# Altium PCB UltiController.PcbDoc (part 1 of 2)
Units mm, origin at the board's own origin, x right, y up, seen from the top; angles counter-clockwise.
Board outline 170 x 47 mm, 2 copper layers (Top Layer, Bottom Layer), stack 1.58 mm thick; 138 components, 71 nets, 382 pads, 231 vias.
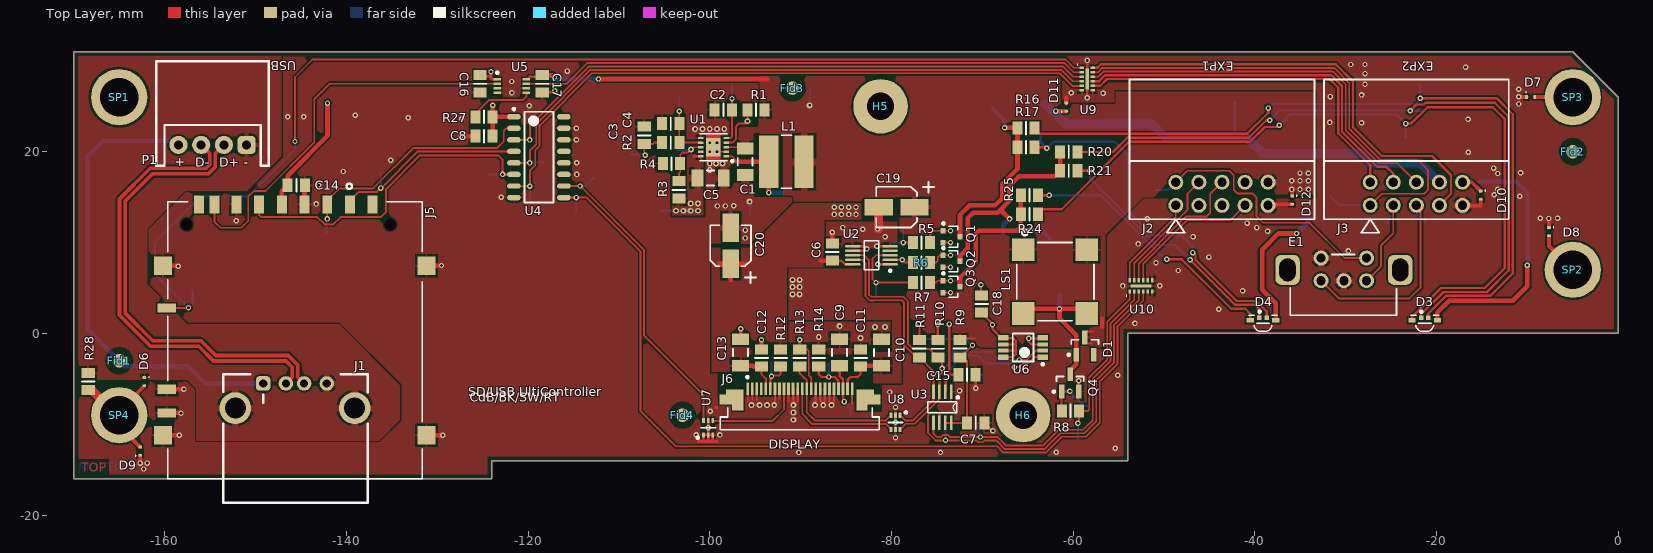
[diagram p0: Top Layer view]
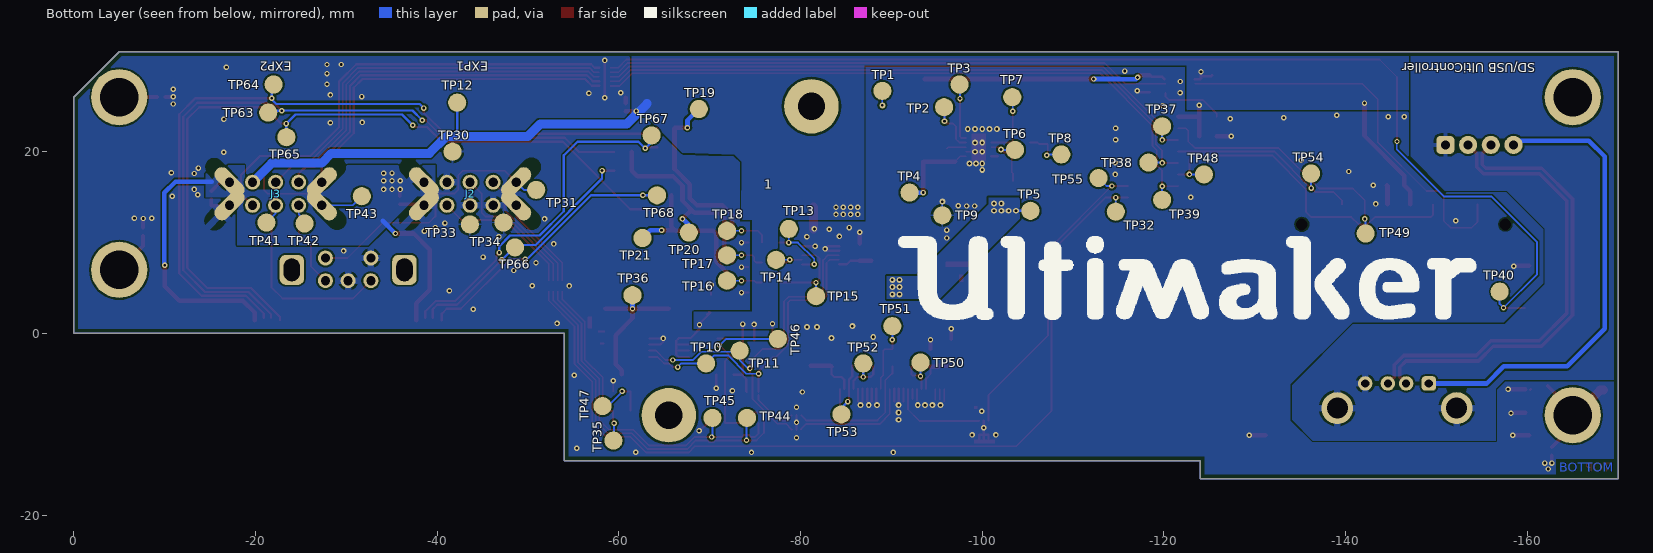
[diagram p1: Bottom Layer view, seen from below]
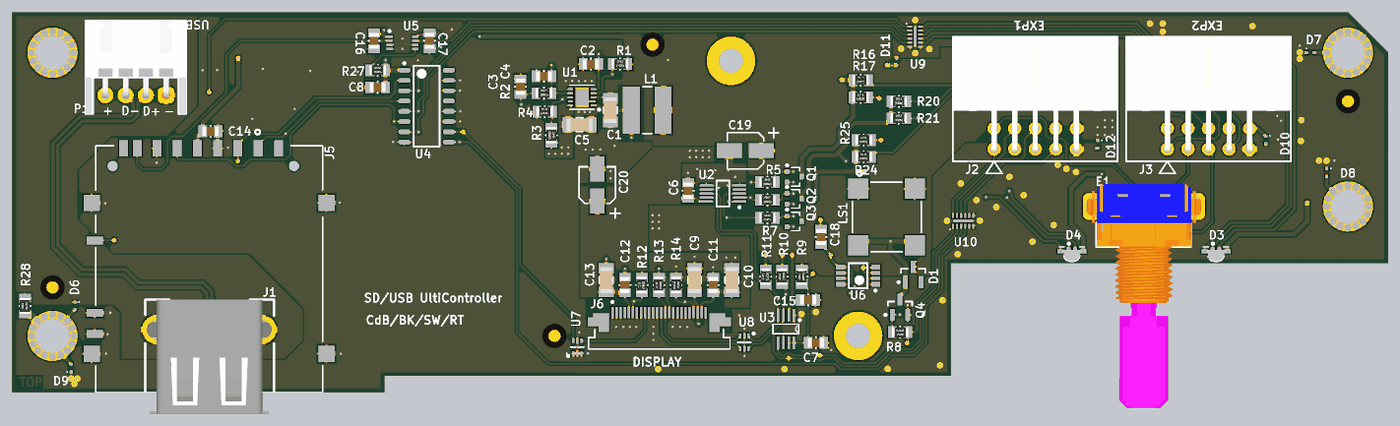
[diagram p3: 3D render of the assembled board from above, using the file's embedded part models]

## Layer stack, top to bottom
Top Solder: solder mask 0.0102, Solder Resist, Dk 3.5
Top Layer: signal copper 0.018
Dielectric1: core 1.5437, FR-4, Dk 4.8
Bottom Layer: signal copper 0.018
Bottom Solder: solder mask 0.0102, Solder Resist, Dk 3.5

## Board outline
-170,-16 -170,31 -5,31 0,26 0,0 -54,0 -54,-14 -124,-14 -124,-16

## Design rules (kind name [scope] priority, off if disabled: settings)
AssemblyTestPointUsage [All] p1 off:
AssemblyTestpoint [All] p1: testpointundercomponent=FALSE minsize=1.016 maxsize=2.54 preferedsize=1.524 minholesize=0 maxholesize=1.016 preferedholesize=0.813 testpointgrid=0.025 usegrid=TRUE gridtolerance=0 allowsidetop=TRUE allowsidebottom=TRUE
Clearance Clearance_2 [InPolygon vs InAnyNet] p1: gap=0.2
Clearance Clearance_1 [InPolygon vs InNet('NetD6_2')] p2: gap=0.4
Clearance Clearance_USB_Polygon [InNet('USB_GND') vs InNet('SD_CARDDETECT') or InPolygon] p3: gap=0.406
Clearance Clearance_USB_lines [InNet('USB_DATA_N') or InNet('USB_DATA_P') vs InPolygon] p4: gap=0.203
Clearance "Clearance spacers" [(InComponent('SP1')) or (InComponent('SP2')) or (InComponent('SP3')) or (InComponent('SP4'))] p5: gap=0.254
Clearance "Clearance fiduals" [(InComponent('Fid1'))or (InComponent('Fid2'))or  (InComponent('Fid3'))or  (InComponent('Fid4'))] p6: gap=0.762
Clearance "Clearance mounting holes" [(InComponent('H5')) or (InComponent('H6'))] p7: gap=0.254
Clearance [All] p8: gap=0.177
ComponentClearance [All] p1: gap=0.25 collisioncheckmode=3 verticalgap=0.25 showdistances=FALSE
DiffPairsRouting DiffPair_USB_DiffPairsRouting [InDifferentialPair ('USB_DATA')] p1: maxlimit=0.203 minlimit=0.203 mostfreqgap=0.203 toplayer_minwidth=0.406 toplayer_maxwidth=0.406 toplayer_prefwidth=0.406 bottomlayer_minwidth=0.406 bottomlayer_maxwidth=0.406 bottomlayer_prefwidth=0.406 maxuncoupledlength=12.7
DiffPairsRouting [All] p2: maxlimit=0.25 minlimit=0.25 mostfreqgap=0.25 toplayer_minwidth=0.381 toplayer_maxwidth=0.381 toplayer_prefwidth=0.381 bottomlayer_minwidth=0.381 bottomlayer_maxwidth=0.381 bottomlayer_prefwidth=0.381 maxuncoupledlength=12.5
FabricationTestPointUsage [All] p1 off: valid=0 allowmultiple=FALSE
Height [All] p1: minheight=0 maxheight=25 prefheight=12.5
HoleSize HoleSize-PTH [All] p1: absolutevalues=TRUE maxlimit=4.3 minlimit=0.25 maxpercent=80.000 minpercent=20.000
HoleToHoleClearance [All] p1: gap=0.15 allowstackedmicrovias=TRUE
MatchedLengths DiffPair_USB_MatchedLengths [InDifferentialPair ('USB_DATA')] p1: tolerance=1.27 checknetsindiffpair=TRUE checkdiffpairvsdiffpair=FALSE checkxsignals=FALSE checkothers=FALSE
MinimumAnnularRing "Minimum IAR  >0.45mm" [((ObjectKind = 'Pad') OR (ObjectKind = 'Via')) And (Layer = 'MultiLayer') And (HoleDiameter > AsMM(0.45))] p1: minimumring=0.25 // minimum inner annular ring for pads > 0.45mm finished hole size
MinimumAnnularRing "Minimum IAR <=0.45mm" [((ObjectKind = 'Pad') OR (ObjectKind = 'Via')) And (Layer = 'MultiLayer') And (HoleDiameter <= AsMM(0.45))] p2: minimumring=0.225 // minimum inner annular ring for pads <= 0.45mm finished hole size
MinimumSolderMaskSliver [All] p1: minsoldermaskwidth=0.1
PlaneClearance PlaneClearance-IPI [All] p1: clearance=0.4
PlaneConnect [All] p1: planeconnectstyle=Relief reliefexpansion=0.4 reliefentries=4 reliefconductorwidth=0.2 reliefairgap=0.2
PolygonConnect "PolygonConnect_caps and connector" [InComponent('C19', 'C20', 'P1')] p1: connectstyle=Relief reliefconductorwidth=0.508 reliefentries=4 polygonreliefangle="90 Angle" airgapwidth=0.254
PolygonConnect PolygonConnect_diodes [InComponent('D7') or InComponent('D8') or InComponent('D9') or InComponent('D10') or InComponent('D11') or InComponent('D12')] p2: connectstyle=NoConnect reliefconductorwidth=0.254 reliefentries=4 polygonreliefangle="90 Angle" airgapwidth=0.254
PolygonConnect "PolygonConnect_ReliefConnect 20mil" [(InComponent('L1'))or (InComponent('C1'))or (InComponent('C5')) or (InComponent('J1'))or(InComponent('J2'))or (InComponent('J3'))or (InComponent('J4'))or (InComponent('E1'))] p3: connectstyle=Relief reliefconductorwidth=0.762 reliefentries=4 polygonreliefangle="90 Angle" airgapwidth=0.254
PolygonConnect PolygonConnect_Via [IsVia] p4: connectstyle=Direct reliefconductorwidth=0.254 reliefentries=4 polygonreliefangle="90 Angle" airgapwidth=0.254
PolygonConnect PolygonConnect-ReliefConnect [All] p5: connectstyle=Relief reliefconductorwidth=0.2 reliefentries=4 polygonreliefangle="90 Angle" airgapwidth=0.254
RoutingCorners [All] p1: cornerstyle=45-Degree minsetback=2.5 maxsetback=2.5
RoutingVias [All] p1: holewidth=0.3 width=0.6 viastyle="Through Hole" minholewidth=0.3 minwidth=0.6 maxholewidth=0.3 maxwidth=0.6
SilkToSilkClearance [All] p1: silktosilkclearance=0
SilkToSolderMaskClearance SilkscreenOverComponentPads [IsPad] p1: minsilkscreentomaskgap=0.2 clearancetoexposedcopper=TRUE
SolderMaskExpansion [All] p1: expansion=0.1
Width Width-xTW [All] p1: maxlimit=1.5 minlimit=0.15 preferedwidth=0.2
16 further rules are at their usual default settings.

## Classes and differential pairs
component class Sheet2: C7 C8 C9 C10 C11 C12 C13 C14 C15 C16 C17 C19 C20 C? D1 D10 D11 D12 E1 J2 J3 J5 J6 LS1 Q4 R8 R9 R10 R11 R12 R13 R14 R27 TP30 TP31 TP32 TP33 TP34 TP35 TP36 TP37 TP38 TP39 TP40 TP41 TP42 TP43 TP44 TP45 TP46 TP47 TP48 TP49 TP50 TP51 TP52 TP53 TP54 TP55 U3 U4 U5 U7 U8 U9 U10 U?
component class Sheet1: C1 C2 C3 C4 C5 C6 C18 D3 D4 D6 D7 D8 D9 Fid1 Fid2 Fid3 Fid4 H2 H5 H6 J1 L1 P1 Q1 Q2 Q3 R1 R2 R3 R4 R5 R6 R7 R16 R17 R20 R21 R24 R25 R28 SP1 SP2 SP3 SP4 TP1 TP2 TP3 TP4 TP5 TP6 TP7 TP8 TP9 TP10 TP11 TP12 TP13 TP14 TP15 TP16 TP17 TP18 TP19 TP20 TP21 TP63 TP64 TP65 TP66 TP67 TP68 U1 U2 U6
differential pair USB_DATA: +USB_DATA_P -USB_DATA_N

## Components (designator, comment, footprint, x,y, rotation, side; value= is the part's Value field where it differs from the comment)
C1 "4.7uF" "C1206 (3216)" -96.1,18.9 r90 top
C2 "10nF" "C0805 (2012)" -98.5,24.6 r0 top
C3 "2.2nF" "C0805 (2012)" -107.2,21.8 r270 top
C4 "15pF" "C0805 (2012)" -104.3,23.1 r0 top
C5 "10uF" "C1206 (3216)" -99.9,17.1 r180 top
C6 "100nF" "C0805 (2012)" -86.5,8.95 r90 top
C7 "10nF" "C0805 (2012)" -70.725,-9.85 r180 top
C8 "100nF" "C0805 (2012)" -124.85,21.725 r0 top
C9 "4.7uF" "C1206 (3216)" -85.7,-2.1 r90 top
C10 "10uF" "C1206 (3216)" -81.1,-2.1 r270 top
C11 "100nF" "C0805 (2012)" -83.4,-2.7 r270 top
C12 "100nF" "C0805 (2012)" -94.3,-2.7 r270 top
C13 "4.7uF" "C1206 (3216)" -96.6,-2.1 r90 top
C14 "100nF" "C0805 (2012)" -145.5,16.3 r180 top
C15 "100nF" "C0805 (2012)" -71.675,-4.55 r180 top
C16 "100nF" "C0805 (2012)" -125.275,27.475 r270 top
C17 "100nF" "C0805 (2012)" -118.435,27.481 r270 top
C18 "100nF" "C0805 (2012)" -70.075,3.225 r270 top
C19 "33u" CAPAE5543X61M -79.425,13.9 r180 top
C20 "22u" CAPAE5543X61M -97.7,9.65 r90 top
D1 "BAS16" "IC SOT23" -58.7,-1.4 r90 top
D3 "LED 598-8810-307F" "LED SMD  598-8810-307F" -21.7,1.7 r180 top
D4 "LED 598-8810-307F" "LED SMD  598-8810-307F" -39.5,1.7 r180 top
D6 "ESD9X3.3ST5G" SODFL100X40-2N -162.225,-5.3 r270 top
D7 "ESD9X3.3ST5G" SODFL100X40-2N -9.65,26.025 r0 top
D8 "ESD9X3.3ST5G" SODFL100X40-2N -7.625,11.2 r270 top
D9 "ESD9X3.3ST5G" SODFL100X40-2N -162.7,-12.95 r90 top
D10 "ESD9X5.0ST5G" SODFL100X40-2N -15.15,15.225 r270 top
D11 "ESD9X3.3ST5G" SODFL100X40-2N -60.766,24.913 r90 top
D12 "ESD9X5.0ST5G" SODFL100X40-2N -35.9,14.675 r270 top
E1 "EC11B15242AE" "MISC EC11B15242AE" -32.7,5.8 r270 top locked
Fid1 "Fiducial" "FIDUCIAL 1,5MM"#1 -162,-3 r180 top
Fid2 "Fiducial" "FIDUCIAL 1,5MM"#2 -5,20 r270 top
Fid3 "Fiducial" "FIDUCIAL 1,5MM"#2 -90.9,27 r270 top
Fid4 "Fiducial" "FIDUCIAL 1,5MM"#2 -103,-9 r270 top
H5 "3mm" "MOUNTING HOLE 3MM PTH" -81.2,25 r90 top
H6 "3mm" "MOUNTING HOLE 3MM PTH" -65.5,-9 r0 top
J1 "UE27AC54100" "USB A" -145.65,-6.865 r0 top locked
J2 "10p" "HEADER 10P RIGHT ANGLE" -48.7,14.1 r0 top locked
J3 "10p" "HEADER 10P RIGHT ANGLE" -27.3,14.1 r0 top locked
J5 "SD Memory Card connector" "CON SD-CARD" -139.6,14.2 r0 top locked
J6 "SFV24R-1STE9LF" "CON SFV24R-1STE9LF" -95.823,-6.1 r0 top
L1 "4.7uH" "INDUCTOR MCSDC0604" -89.6,18.9 r90 top
LS1 "KSSGJ4B20" "BUZZER KSSGJ4B20" -65.5,9.2 r270 top
P1 "S4B-XH-A" S4B-XH-A -154.725,20.75 r0 top
Q1 "PBSS4140U" "IC SOT323" -74.3,11.3 r180 top
Q2 "PBSS4140U" "IC SOT323" -74.3,8.6 r180 top
Q3 "PBSS4140U" "IC SOT323" -74.3,5.8 r180 top
Q4 "MMBT3904" "IC SOT23" -60.325,-5.45 r90 top
R1 "10K" "R0805 (2012)" -94.9,24.6 r0 top
R2 "46.4K" "R0805 (2012)" -104.3,21 r0 top
R3 "191K" "R0805 (2012)" -103.4,15.8 r270 top
R4 "20.5K" "R0805 (2012)" -104.2,18.7 r0 top
R5 "330E" "R0805 (2012)" -76.7,10 r0 top
R6 "330E" "R0805 (2012)" -76.7,7.8 r0 top
R7 "330E" "R0805 (2012)" -76.7,5.6 r0 top
R8 "330E" "R0805 (2012)" -60.3,-8.525 r180 top
R9 "191K" "R0805 (2012)" -72.45,-1.675 r90 top
R10 "4.7K" "R0805 (2012)" -74.885,-1.688 r90 top
R11 "4.7K" "R0805 (2012)" -76.912,-1.675 r90 top
R12 "10K" "R0805 (2012)" -92.2,-2.7 r90 top
R13 "0E" "R0805 (2012)" -90.1,-2.7 r90 top
R14 "1M" "R0805 (2012)" -88,-2.7 r270 top
R16 "150E" "R0805 (2012)" -65.178,22.597 r0 top
R17 "150E" "R0805 (2012)" -65.178,20.497 r0 top
R20 "100E" "R0805 (2012)" -60.475,19.975 r0 top
R21 "100E" "R0805 (2012)" -60.475,17.9 r0 top
R24 "100E" "R0805 (2012)" -64.8,13.125 r0 top
R25 "100E" "R0805 (2012)" -64.8,15.2 r0 top
R27 "10K" "R0805 (2012)" -124.85,23.825 r0 top
R28 "1M" "R0805 (2012)" -168.4,-5.3 r90 top
SP1 "M3-10ET" "SPACER M3-10ET" -165,26 r0 top locked
SP2 "M3-10ET" "SPACER M3-10ET" -5,7 r0 top locked
SP3 "M3-10ET" "SPACER M3-10ET" -5,26 r0 top locked
SP4 "M3-10ET" "SPACER M3-10ET" -165,-9 r0 top locked
TP1 "2mm" "TESTPOINT 2MM" -89,26.7 r270 bottom locked
TP2 "2mm" "TESTPOINT 2MM" -95.8,24.9 r90 bottom locked
TP3 "2mm" "TESTPOINT 2MM" -97.5,27.4 r90 bottom locked
TP4 "2mm" "TESTPOINT 2MM" -92,15.5 r90 bottom locked
TP5 "2mm" "TESTPOINT 2MM" -105.3,13.5 r90 bottom locked
TP6 "2mm" "TESTPOINT 2MM" -103.6,20.2 r90 bottom locked
TP7 "2mm" "TESTPOINT 2MM" -103.3,26 r90 bottom locked
TP8 "2mm" "TESTPOINT 2MM" -108.7,19.7 r90 bottom locked
TP9 "2mm" "TESTPOINT 2MM" -95.6,13 r0 bottom locked
TP10 "2mm" "TESTPOINT 2MM" -69.6,-3.3 r90 bottom locked
TP11 "2mm" "TESTPOINT 2MM" -73.3,-1.9 r90 bottom locked
TP12 "2mm" "TESTPOINT 2MM" -42.2,25.4 r90 bottom locked
TP13 "2mm" "TESTPOINT 2MM" -78.7,11.5 r90 bottom locked
TP14 "2mm" "TESTPOINT 2MM" -77.3,8.1 r90 bottom locked
TP15 "2mm" "TESTPOINT 2MM" -81.7,4.1 r90 bottom locked
TP16 "2mm" "TESTPOINT 2MM" -71.9,5.8 r90 bottom locked
TP17 "2mm" "TESTPOINT 2MM" -71.9,8.6 r90 bottom locked
TP18 "2mm" "TESTPOINT 2MM" -71.9,11.3 r90 bottom locked
TP19 "2mm" "TESTPOINT 2MM" -68.8,24.7 r90 bottom locked
TP20 "2mm" "TESTPOINT 2MM" -67.7,11.1 r90 bottom locked
TP21 "2mm" "TESTPOINT 2MM" -62.6,10.5 r90 bottom locked
TP30 "2mm" "TESTPOINT 2MM" -41.7,20 r90 bottom locked
TP31 "2mm" "TESTPOINT 2MM" -50.9,15.8 r0 bottom locked
TP32 "2mm" "TESTPOINT 2MM" -114.7,13.4 r90 bottom locked
TP33 "2mm" "TESTPOINT 2MM" -43.6,12 r90 bottom locked
TP34 "2mm" "TESTPOINT 2MM" -47.3,12.2 r90 bottom locked
TP35 "2mm" "TESTPOINT 2MM" -59.4,-11.8 r0 bottom locked
TP36 "2mm" "TESTPOINT 2MM" -61.5,4.2 r90 bottom locked
TP37 "2mm" "TESTPOINT 2MM" -119.8,22.8 r90 bottom locked
TP38 "2mm" "TESTPOINT 2MM" -118.3,18.8 r90 bottom locked
TP39 "2mm" "TESTPOINT 2MM" -119.8,14.7 r90 bottom locked
TP40 "2mm" "TESTPOINT 2MM" -156.95,4.6 r90 bottom locked
TP41 "2mm" "TESTPOINT 2MM" -21.2,12.2 r0 bottom locked
TP42 "2mm" "TESTPOINT 2MM" -25.4,12.1 r0 bottom locked
TP43 "2mm" "TESTPOINT 2MM" -31.7,15.1 r90 bottom locked
TP44 "2mm" "TESTPOINT 2MM" -74.1,-9.3 r0 bottom locked
TP45 "2mm" "TESTPOINT 2MM" -70.3,-9.3 r0 bottom locked
TP46 "2mm" "TESTPOINT 2MM" -77.5,-0.6 r90 bottom locked
TP47 "2mm" "TESTPOINT 2MM" -58.2,-8 r90 bottom locked
TP48 "2mm" "TESTPOINT 2MM" -124.4,17.5 r90 bottom locked
TP49 "2mm" "TESTPOINT 2MM" -142.2,11 r90 bottom locked
TP50 "2mm" "TESTPOINT 2MM" -93.2,-3.2 r90 bottom locked
TP51 "2mm" "TESTPOINT 2MM" -90.1,0.8 r90 bottom locked
TP52 "2mm" "TESTPOINT 2MM" -86.9,-3.3 r90 bottom locked
TP53 "2mm" "TESTPOINT 2MM" -84.5,-8.9 r90 bottom locked
TP54 "2mm" "TESTPOINT 2mm" -136.2,17.6 r270 bottom locked
TP55 "2mm" "TESTPOINT 2mm" -112.8,17.1 r270 bottom locked
TP63 "2mm" "TESTPOINT 2mm" -21.4,24.3 r270 bottom locked
TP64 "2mm" "TESTPOINT 2mm" -22,27.4 r270 bottom locked
TP65 "2mm" "TESTPOINT 2mm" -23.4,21.6 r270 bottom locked
TP66 "2mm" "TESTPOINT 2mm" -48.563,9.463 r270 bottom locked
TP67 "2mm" "TESTPOINT 2mm" -63.6,21.8 r270 bottom locked
TP68 "2mm" "TESTPOINT 2mm" -64.2,15.2 r270 bottom locked
U1 "IC LM4510SD/NOPB" "IC SDA10A" -98.2,19.5 r90 top
U2 "PCA9632DP2" "IC TSSOP-10" -82.2,8.6 r180 top
U3 "PCA9306" "IC SSOP-8" -73.425,-6.446 r180 top locked
U4 "74HC4050D" "IC SOIC-16" -118.8,19.4 r0 top locked
U5 "74LVC2T45DC,125" TSSOP50P310X100-8N -121.785,27.231 r0 top
U6 "LM75BDP,118 TSSOP8" LM75BDP,118 -65.5,-1.55 r180 top locked
U7 "NUF2230" SOTFL50P160X60-6N -100.175,-10.375 r90 top
U8 "NUF2230" SOTFL50P160X60-6N -79.55,-9.8 r270 top
U9 "NUF6401" SON50P140X100_HS-13N -58.45,28 r0 top
U10 "NUF6401" SON50P140X100_HS-13N -52.525,5.225 r90 top

## Footprints (in the part's own frame and the unit in brackets; to place one, negate y for a bottom-side part, rotate by r counter-clockwise, add the part's x,y. Pads: shape width x height; smd on the part's side, far side on the other; paste and mask are expansions set on the pad)
"BUZZER KSSGJ4B20" [mm] "Buzzer KSSGJ4B20 SMD"
  rect 2.5x2.5 smd: 1(0,0) 2(0,7) 3(7,7) 4(7,0)
  silkscreen extent -2.2,-0.7 7.8,7.8, body extent -0.75,-0.7 7.75,7.8, height 3.2
"C0805 (2012)" [mm] "hip Capacitor, 2-Leads, Body 2,0x1.25mm, IPC Medium Density"
  rect 1.1x1.45 smd: 1(-0.95,0) 2(0.95,0)
  silkscreen extent 0,-0.7 0,0.7, body extent -1,-0.6 1,0.6, height 1.19
"C1206 (3216)" [mm] "Chip Capacitor, 2-Leads, Body 3.2x1.6mm, IPC Medium Density"
  rect 1.3x1.85 smd: 1(-1.45,0) 2(1.45,0)
  silkscreen extent -0.4,-0.82 0.4,0.82, body extent -1.6,-0.8 1.6,0.8, height 0.77
CAPAE5543X61M [mm] "Aluminum Electrolytic Capacitor, Body 4,30x4,30x6,10mm, IPC Low Density"
  rect 3.1x1.8 smd: 1(-1.975,0) 2(1.975,0)
  silkscreen extent -4.1,-2.8 2.25,2.25, body extent -2.25,-2.25 2.25,2.25, height 6.1
"CON SD-CARD" [mm] "Std,reverse SD Memory Card connector SMD"
  round 0 hole 1.3 unplated: 0(-17.975,-2.2) 0(4.425,-2.2)
  rect 1.1x2 smd: 1(0,0) 2(-2.5,0) 3(-5,0) 4(-7.5,0) 5(-10,0) 6(-12.5,0) 7(-14.925,0) 8(-16.625,0) 9(2.5,0)
  rect 2x1 smd: 10(-20.175,-11.4) 11(-20.175,-20.35) 12(-20.175,-22.95)
  rect 2x2 smd: A(8.425,-6.75) B(8.425,-25.4) C(-20.575,-6.75) D(-20.575,-25.4)
  silkscreen extent -20.05,-30.2 7.95,2.3, body extent -20.05,-30.2 7.95,0.3, height 2.9
"CON SFV24R-1STE9LF" [mm] "Connnector SFV24R-1STE9LF 24 pins SMD"
  rect 0.7x1.1 smd: 0(-2.75,-1.15) 0(14.25,-1.15)
  rect 1.95x1.6 smd: 0(-1.43,-0.9) 0(12.93,-0.9)
  rect 1.25x0.7 smd: 0(-1.08,-2.05) 0(12.58,-2.05)
  rect 0.3x1.4 smd: 1(0,0) 2(0.5,0) 3(1,0) 4(1.5,0) 5(2,0) 6(2.5,0) 7(3,0) 8(3.5,0) 9(4,0) 10(4.5,0) 11(5,0) 12(5.5,0) 13(6,0) 14(6.5,0) 15(7,0) 16(7.5,0) 17(8,0) 18(8.5,0) 19(9,0) 20(9.5,0) 21(10,0) 22(10.5,0) 23(11,0) 24(11.5,0)
  silkscreen extent -3,-4.5 14.5,1.42, body extent -3,-4.5 14.5,-0.3, height 1.8
"FIDUCIAL 1,5MM"#1 [mm] "Fiducial 1,5mm"
  round 1.5 smd paste-3 mask+0.75: ""(3,0)
"FIDUCIAL 1,5MM"#2 [mm] "Fiducial 1,5mm"
  round 1.5 smd paste-3 mask+0.75: ""(0,0)
"HEADER 10P RIGHT ANGLE" [mm] "Header 2x5p right angle 2.54mm"
  round 1.65 hole 1.02: 1(0,0) 2(0,2.54) 3(2.54,0) 4(2.54,2.54) 5(5.08,0) 6(5.08,2.54) 7(7.62,0) 8(7.62,2.54) 9(10.16,0) 10(10.16,2.54)
  oval 1.65x4 smd far side rot 135 paste-2 mask+0: 1(0,0) 10(10.16,2.54)
  oval 1.65x4 smd far side rot 45 paste-2 mask+0: 2(0,2.54) 9(10.16,0)
  silkscreen extent -5.09,-3.02 15.26,13.86, body extent -5.08,-0.32 15.24,13.86, height 8.8
"IC SDA10A" [mm] "SON- 10-Leads, Body 3x3mm, Pitch 0.5mm"
  rect 0.25x0.6 smd paste+0: 1(0,0) 2(0.5,0) 3(1,0) 4(1.5,0) 5(2,0) 6(2,2.8) 7(1.5,2.8) 8(1,2.8) 9(0.5,2.8) 10(0,2.8)
  rect 2x1.6 smd paste+0: 11(1,1.4)
  silkscreen extent -0.65,-0.83 2.5,2.9, body extent -0.5,-0.1 2.5,2.9, height 0.8
"IC SOIC-16" [mm] "SOIC, 16-Leads, Body 9.9x3.9mm, Pitch 1.27mm, IPC Medium Density"
  oval 1.5x0.6 smd: 1(-2.75,4.445) 2(-2.75,3.175) 3(-2.75,1.905) 4(-2.75,0.635) 5(-2.75,-0.635) 6(-2.75,-1.905) 7(-2.75,-3.175) 8(-2.75,-4.445) 9(2.75,-4.445) 10(2.75,-3.175) 11(2.75,-1.905) 12(2.75,-0.635) 13(2.75,0.635) 14(2.75,1.905) 15(2.75,3.175) 16(2.75,4.445)
  silkscreen extent -2.87,-5 1.6,5.42, body extent -2,-5 2,5, height 1.73
"IC SOT23" [mm] "SOT23, 3-Leads, Body 2.9x1.3mm, Pitch 0.95mm, Lead Span 2.5mm, IPC Medium Density"
  rect 1.5x0.6 smd: 1(-0.95,0.95) 2(-0.95,-0.95) 3(0.95,0)
  silkscreen extent -1.07,-1.5 0.7,1.92, body extent -0.7,-1.5 0.7,1.5, height 1.1
"IC SOT323" [mm] "IC SOT323"
  rect 0.55x0.6 smd paste+0: 1(0,0) 2(0,1.3) 3(-1.85,0.65)
  silkscreen extent -1.6,-0.92 0.1,1.8, body extent -1.6,-0.5 -0.2,1.8, height 1.1
"IC SSOP-8" [mm] "IC SSOP-8 SMD"
  rect 0.3x1.6 smd paste+0: 1(0,0) 2(0.65,0) 3(1.3,0) 4(1.95,0) 5(1.95,3.4) 6(1.3,3.4) 7(0.65,3.4) 8(0,3.4)
  silkscreen extent -0.85,0.48 2.6,2.3, body extent -0.6,0.3 2.6,3.2, height 1.3
"IC TSSOP-10" [mm] "TSSOP, 10-Leads, Body 3x3mm, Pitch 0.5mm, IPC Medium Density"
  oval 1.7x0.3 smd: 1(-2.05,1) 2(-2.05,0.5) 3(-2.05,0) 4(-2.05,-0.5) 5(-2.05,-1) 6(2.05,-1) 7(2.05,-0.5) 8(2.05,0) 9(2.05,0.5) 10(2.05,1)
  silkscreen extent -2.17,-1.6 0.8,1.82, body extent -1.6,-1.6 1.6,1.6, height 1.1
"INDUCTOR MCSDC0604" [mm] "Inductor MCSDC0604"
  rect 5.8x2.1 smd paste+0: 1(0,0) 2(0,3.9)
  silkscreen extent -2.9,1.4 2.9,2.5, body extent -2.9,-1 2.9,4.9, height 1.8
"LED SMD  598-8810-307F" [mm] "LED tricolor SMD"
  rect 0.5x0.5 smd: 1(0,0) 2(-0.8,0)
  rect 0.8x0.5 smd: 3(1,0.25) 4(-1.8,0.25)
  silkscreen extent -1.95,-0.82 1.15,1.48, body extent -2,0.05 1.2,1.46, height 0.99
LM75BDP,118 [mm] "TSOP, 8-Leads, Body 3,00x3,00mm, Pitch 0,65mm, IPC Medium Density"
  rect 1.15x0.6 smd: 1(-2.175,1.05) 4(-2.175,-1.05) 5(2.175,-1.05) 8(2.175,1.05)
  rect 1.15x0.45 smd: 2(-2.175,0.325) 3(-2.175,-0.325) 6(2.175,-0.325) 7(2.175,0.325)
  silkscreen extent -2.28,-1.55 1.15,1.97, body extent -1.55,-1.55 1.55,1.55, height 1.1
"MISC EC11B15242AE" [mm] "Misc EC11B15242AE encoder"
  rrect50% 3.3x2.7 hole 1.8 slot 2.5 at 0 deg: 0(-1.2,8.7) 0(-1.2,-3.7)
  round 1.65 hole 1: A(0,0) B(0,5) C(0,2.5) D(-2.5,0) E(-2.5,5)
  silkscreen extent -2.9,-3.4 3.8,8.3, body extent -4,-4.55 23.75,9.55, height 13.79
"MOUNTING HOLE 3MM PTH" [mm] "Mounting Hole 3mm PTH"
  round 6 hole 3: 0(0,0)
"R0805 (2012)" [mm] "hip Resistor, 2-Leads, Body 2,0x1.25mm, IPC Medium Density"
  rect 1.1x1.45 smd: 1(-0.95,0) 2(0.95,0)
  silkscreen extent 0,-0.7 0,0.7, body extent -1,-0.6 1,0.65, height 0.44
S4B-XH-A [mm] "JST 4P XH connector (2.5mm, 3A)"
  rrect50% 2x2 hole 1: 1(3.75,0)
  round 2 hole 1: 2(1.25,0) 3(-1.25,0) 4(-3.75,0)
  silkscreen extent -6.2,-2.3 6.2,9.2, body extent -6.19,-2.29 6.21,9.21, height 6.12
SODFL100X40-2N [mm] "SODFL, 2-Leads, Body 0,60x1,00mm, IPC Medium Density"
  rect 0.3x0.4 smd: 1(-0.45,0) 2(0.45,0)
  silkscreen extent -0.55,0.45 -0.45,0.55, body extent -0.42,-0.33 0.43,0.33, height 0.4
SON50P140X100_HS-13N [mm] "SON, 12-Leads, Body 3,00x1,35mm, Pitch 0,50mm, Thermal Pad 2,20x0,13mm, IPC Medium Density"
  rect 0.479x0.265 smd: 1(-0.614,1.25) 2(-0.614,0.75) 3(-0.614,0.25) 4(-0.614,-0.25) 5(-0.614,-0.75) 6(-0.614,-1.25) 7(0.614,-1.25) 8(0.614,-0.75) 9(0.614,-0.25) 10(0.614,0.25) 11(0.614,0.75) 12(0.614,1.25)
  rect 0.351x2.352 smd: 13(0,0)
  silkscreen extent -1.12,1.54 -1.02,1.64, body extent -0.67,-1.5 0.67,1.5, height 1
SOTFL50P160X60-6N [mm]
  rect 0.57x0.3 smd: 1(-0.79,0.5) 2(-0.79,0) 3(-0.79,-0.5) 4(0.79,-0.5) 5(0.79,0) 6(0.79,0.5)
  silkscreen extent -1.22,-0.8 0,1.27
"SPACER M3-10ET" [mm] "Spacer M3-10ET"
  round 6.2 hole 4.22: 1(0,0)
  body extent -2.73,-2.74 2.75,2.74, height 10
"TESTPOINT 2MM" [mm] "TESTPOINT 2mm"
  round 2 smd paste-2 mask+0: 1(0,0)
"TESTPOINT 2mm" [mm] "TESTPOINT 2mm"
  round 2 smd paste-2 mask+0: 1(0,0)
TSSOP50P310X100-8N [mm] "TSSOP, 8-Leads, Body 2,00x2,30mm, Pitch 0,50mm, IPC Medium Density"
  rect 0.8x0.3 smd: 1(-1.6,0.75) 2(-1.6,0.25) 3(-1.6,-0.25) 4(-1.6,-0.75) 5(1.6,-0.75) 6(1.6,-0.25) 7(1.6,0.25) 8(1.6,0.75)
  silkscreen extent -1.72,1.33 -1.47,1.57, body extent -1.2,-1.05 1.2,1.05, height 1
"USB A" [mm] "U27ACX4X0X"
  rrect50% 1.6x1.6 hole 0.9: 1(-3.5,1.355)
  round 1.6 hole 0.9: 2(-1,1.355) 3(1,1.355) 4(3.5,1.355)
  round 3.5 hole 2.3: 5(-6.57,-1.355) 6(6.57,-1.355)
  silkscreen extent -7.9,-11.78 8,2.36, body extent -7.88,-11.77 7.91,2.33, height 7.47

## Part data
C1 C9 C13: library part "Cap 4.7uF X7R 1206", "Cap 4.7uF 1206 X7R 10% 25V"
C2 C7: library part "Cap 10nF X7R 0805", "Cap 10nF X7R 0805 10% 100V"
C3: library part "Cap 2.2nF X7R 0805", "Cap 2.2nF X7R 0805 10% 100V"
C4: library part "Cap 15pF NPO 0805", "Cap 15pF NPO 0805 5% 100V"
C5 C10: library part "Cap 10uF X7R 1206", "Cap 10uF 1206 X7R 10% 25V"
C6 C8 C11 C12 C14 C15 C16 C17 C18: library part "Cap 100nF X7R 0805", "Cap 100nF X7R 0805 10% 100V"
C19: library part "Cap 33uF", "CAP ALUM 33UF 20% 10V SMD"
C20: library part "Cap 22uF", "CAP ALUM 22UF 20% 6.3V SMD"
D1: library part "Diode BAS16", "Diode BAS16  SOT23 85V 215MA"
D3 D4: "LED MULTICOLOR RED/GRN/BLUE 1208"
D6 D7 D8 D9 D11: "TVS DIODE 3.3VWM 10.4VC SOD923"
D10 D12: "TVS DIODE 5VWM 12.3VC SOD923"
E1: library part "Misc EC11B15242AE", "Misc EC11B15242AE encoder horiz"
H5 H6: "Mounting Hole 3mm PTH"
J1: "CONN RCPT USB TYPE A R/A GOLD"
J2 J3: "Header 2x5p right angle 2.54mm"
J5: "Connector Std,reverse SD Memory Card connector"
J6: library part "Connector SFV24R-1STE9LF", "Connector FPC/FFC 0.5mm R/A 24p SMD"
L1: library part "Inductor 4.7uH SMD", "Inductor 4.7uH SMD"
LS1: library part "Buzzer KSSGJ4B20", "Buzzer KSSGJ4B20 SMD"
P1: "CONN HEADER XH SIDE 4POS 2.5MM"
Q1 Q2 Q3: library part "NPN PBSS4140U", "NPN PBSS4140U SOT-323 1A"
Q4: library part "NPN MMBT3904", "NPN MMBT3904 SOT-23 200mA"
R1 R12 R27: library part "Res 10K 0805", "Res 10K 0805 1% 100mW"
R2: library part "Res 46.4K 0805", "Res 46.4K 0805 1% 100mW"
R3 R9: library part "Res 191K 0805", "Res 191K 0805 1% 125mW"
R4: library part "Res 20.5K 0805", "Res 20.5K 0805 1% 100mW"
R5 R6 R7 R8: library part "Res 330E 0805", "Res 330E 0805 1% 100mW"
R10 R11: library part "Res 4.7K 0805", "Res 4.7K 0805 1% 100mW"
R13: library part "Res 0E 0805", "Res 0E 0805 1% 100mW"
R14 R28: library part "Res 1M 0805", "Res 1M 0805 1% 100mW"
R16 R17: library part "Res 150E 0805", "Res 150E 0805 1% 125mW"
R20 R21 R24 R25: library part "Res 100E 0805", "Res 100E 0805 1% 125mW"
SP1 SP2 SP3 SP4: "Spacer SMTSO-M3-10ET"
TP1 TP2 TP3 TP4 TP5 TP6 TP7 TP8 TP9 TP10 TP11 TP12 TP13 TP14 TP15 TP16 TP17 TP18 TP19 TP20 TP21 TP30 TP31 TP32 TP33 TP34 TP35 TP36 TP37 TP38 TP39 TP40 TP41 TP42 TP43 TP44 TP45 TP46 TP47 TP48 TP49 TP50 TP51 TP52 TP53 TP54 TP55 TP63 TP64 TP65 TP66 TP67 TP68: "Testpoint, 2mm, round"
U1: "IC Synchronous Step-Up DC/DC Converter with True Shutdown Isolation, 10-pin LLP, Pb-Free"
U2: library part "IC PCA9632", "IC LED DRIVER RGBA"
U3: library part "IC PCA9306", "IC PCA9306 Voltage Level translator"
U4: library part "IC 74HC4050D", "IC Hex Non-Inverting Buffer/Logic-Level Down Converter"
U5: "2-bit translaing transceiver"
U6: library part LM75BDP, "i2c temperature sensor"

## Via types
v1: diameter 0.6, hole 0.3, Top Layer to Bottom Layer, tented both sides, 115 vias
v2: diameter 0.6, hole 0.3, Top Layer to Bottom Layer, 72 vias
v3: diameter 0.65, hole 0.3, Top Layer to Bottom Layer, tented both sides, 40 vias
v4: diameter 0.65, hole 0.3, Top Layer to Bottom Layer, 4 vias

## Nets (pads, with @x,y where several pads share a name; then routed paths per layer and width w, separated by ;. In a path a pad name is that pad's centre, name@x,y a point inside that pad or via, vN(x,y) a via of type N, cw(c..) or ccw(c..) an arc to the next point about the centre after c; other vN are vias at no path point)
3.3V: C6.1 C8.2 C12.2 C13.1 C14.2 C15.2 C16.1 C18.2 C20.1 D11.1 J3.8 J5.4 J6.5 R10.2 R11.2 R12.2 R27.2 TP12.1 U2.10 U3.2 U4.1 U5.1 U6.5 U6.6 U6.7 U6.8 | length 106.2
  Top Layer w0.2: v2(-61.925,24.475) v2@-61.913,24.463
  Top Layer w0.203: C12.2@-94.3,-3.65 -94.3,-4.5 -93.823,-4.977 J6.5@-93.823,-6.1
  Top Layer w0.254: C6.1@-86.45,7.95 C6.1@-86.5,8 -85.493,8 -85.093,7.6 U2.10@-84.25,7.6 ; R11.2@-76.912,-0.725 -76.912,1.163 -76.904,1.155 v2@-76.912,1.146 ; R10.2@-74.885,-0.738 v2(-74.885,0.985) ; U3.2@-74.075,-6.446 -74.019,-6.39 -74.019,-5.019 -73.625,-4.625 ; v2(-73.65,1.025) -73.625,1.05 -73.625,-4.625 ; C15.2@-72.625,-4.55 -73.55,-4.55 -73.625,-4.625 ; C18.2@-70.075,2.275 -68.75,0.95 v2(-68.875,0.95) -68.875,0.475 -67.9,-0.5 U6.5@-67.675,-0.5 -66.625,-0.5 -66.325,-0.8 -66.325,-1.225 ; C18.2@-69.95,2.325 C18.2@-69.7,2.075 ; U6.8@-67.675,-2.6 -66.6,-2.6 -66.325,-2.325 -66.325,-1.225 ; U6.7@-67.675,-1.875 -66.35,-1.875 ; U6.6@-67.675,-1.225 -66.325,-1.225
  Top Layer w0.3: C16.1@-125.275,28.425 -125.15,28.3 -124.075,28.3 ; v1(-124.075,28.8) -124.075,28.3 ; U5.1@-123.385,27.981 -123.981,27.981 -124.075,28.075 -124.075,28.3
  Top Layer w0.5: C8.2@-123.9,21.725 R27.2@-123.9,23.825 -121.57,23.825 U4.1@-121.55,23.845 ; R27.2@-123.875,23.85 v1(-123.875,25.1) ; v2@-61.913,24.463 D11.1@-60.766,24.463
  Top Layer w0.508: J5.4@-147.1,14.2 -147.1,15.65 C14.2@-146.45,16.3 -146.45,17.374 -142.075,21.749 v2(-142.075,25.35) ; C13.1@-96.6,-3.55 -95.25,-3.55 -95.15,-3.65 C12.2@-94.3,-3.65 ; -87.8,8 C6.1@-86.5,8
  Bottom Layer w0.254: -42.2,21.703 TP12.1@-42.2,25.4
  Bottom Layer w1: -63.1,25.289 -60.863,23.053 -51.35,23.053 -49.976,21.678 -41.005,21.678 -39.149,19.822 -28.357,19.822 -27.272,18.738 -21.778,18.738 J3.8@-19.68,16.64
  other v1: -86.3,13.1 -85.5,13.1 -84.7,13.1 -83.9,13.1 -86.3,13.875 -85.5,13.875 -84.7,13.875 -83.9,13.875
  other v2: -76.912,1.05
5V: C1.2 C17.1 C19.1 D1.3 D3.4 D4.4 D10.1 D12.1 J2.10 J3.10 L1.1 LS1.1 LS1.2 R1.2 R9.2 TP1.1 U1.3 U5.8 | length 76.4
  Top Layer w0.203: U1.3@-98.2,20.5 -96.25,20.5 C1.2@-96.1,20.35
  Top Layer w0.3: U5.8@-120.032,27.981 -119.763,28.25 C17.1@-118.616,28.25
  Top Layer w0.4: D12.1@-35.9,15.125 v1@-35.9,15.825 ; J3.10@-17.14,16.64 -16.115,16.64 D10.1@-15.15,15.675
  Top Layer w0.5: C17.1@-118.435,28.431 -117.356,28.431 v1(-117.098,28.173) ; v1(-112.25,28.005) -93.686,28.005 -93.675,27.994
  Top Layer w0.508: D4.4@-37.7,1.45 -37.7,3.3 -39.2,4.8 -39.2,9.2 -37.4,11 v1(-35.4,11) ; D3.4@-19.9,1.45 -19.9,2.3 -18.62,3.58 -11.62,3.58 -10.025,5.175 v2(-10.025,7.5)
  Bottom Layer w0.2: v3(-89,25.1) TP1.1@-89,26.9
  Bottom Layer w0.5: v1(-117.098,28.173) -116.919,27.994 -115.144,27.994 -115.133,28.005 v1(-112.25,28.005)
  Bottom Layer w0.508: v1(-35.4,11) -34,12.4 ; -15.2,16.7 -11.2,16.7 -9.971,15.471 -9.971,7.554 v2(-10.025,7.5)
  other v1: -35.925,15.85 -35.025,15.85 -34.1,15.85 -35.925,16.8 -35.025,16.8 -34.1,16.8 -34.1,17.625 -35.025,17.65
13V: C5.2 C10.2 C11.2 J6.23 R3.2 TP5.1 U1.10 | length 8.1
  Top Layer w0.254: -101.7,19.5 U1.10@-101,19.5 ; J6.23@-84.823,-6.1 -84.823,-5.123 -84.5,-4.8 -83.7,-4.8 -83.4,-4.5 C11.2@-83.4,-3.65
  Top Layer w0.508: C11.2@-83.4,-3.65 -83.3,-3.55 C10.2@-81.1,-3.55
  Bottom Layer w0.254: TP5.1@-105.3,13.5 v3(-103.7,13.5)
  other v3: -90.9,4.3 -90.1,4.3 -90.9,5.1 -90.1,5.1 -90.9,5.9 -90.1,5.9 -102.9,13.5 -102.1,13.5 -101.3,13.5 -102.1,14.3 -101.3,14.3
BLUE1: D3.3 R24.2 TP65.1 | length 88.3
  Top Layer w0.254: R24.2@-63.85,13.125 -63.3,13.675 -61.25,13.675 -53.814,21.111 -40.492,21.111 -38.879,22.725 -37.5,22.725 v2(-37.325,22.9) ; v2(-23.4,23.1) -22.8,23.1 -21,24.9 -13.8,24.9 -12.475,23.575 -12.475,7.225 -14.7,5 -19.5,5 -22.7,1.8 D3.3@-22.7,1.45
  Bottom Layer w0.254: v2(-37.325,22.9) -36.125,24.1 -24.4,24.1 v2(-23.4,23.1) TP65.1@-23.4,21.6
BLUE2: D4.3 R25.2 TP68.1 | length 31
  Top Layer w0.254: R25.2@-63.85,15.2 v2(-62.65,15.2) ; v1(-49.7,8.15) -48.032,8.15 -42.594,2.711 -41.061,2.711 -40.5,2.15 D4.3@-40.5,1.45
  Bottom Layer w0.254: TP68.1@-64.2,15.2 v2(-62.65,15.2) -56.921,15.2 -49.871,8.15 v1(-49.7,8.15)
BUZZER: J2.1 U10.12 | length 10.4
  Top Layer w0.203: U10.12@-53.775,5.839 -53.775,7.764 -48.7,12.839 J2.1@-48.7,14.1